# EAGLE board main_schematic4 (EAGLE 7.1.0)
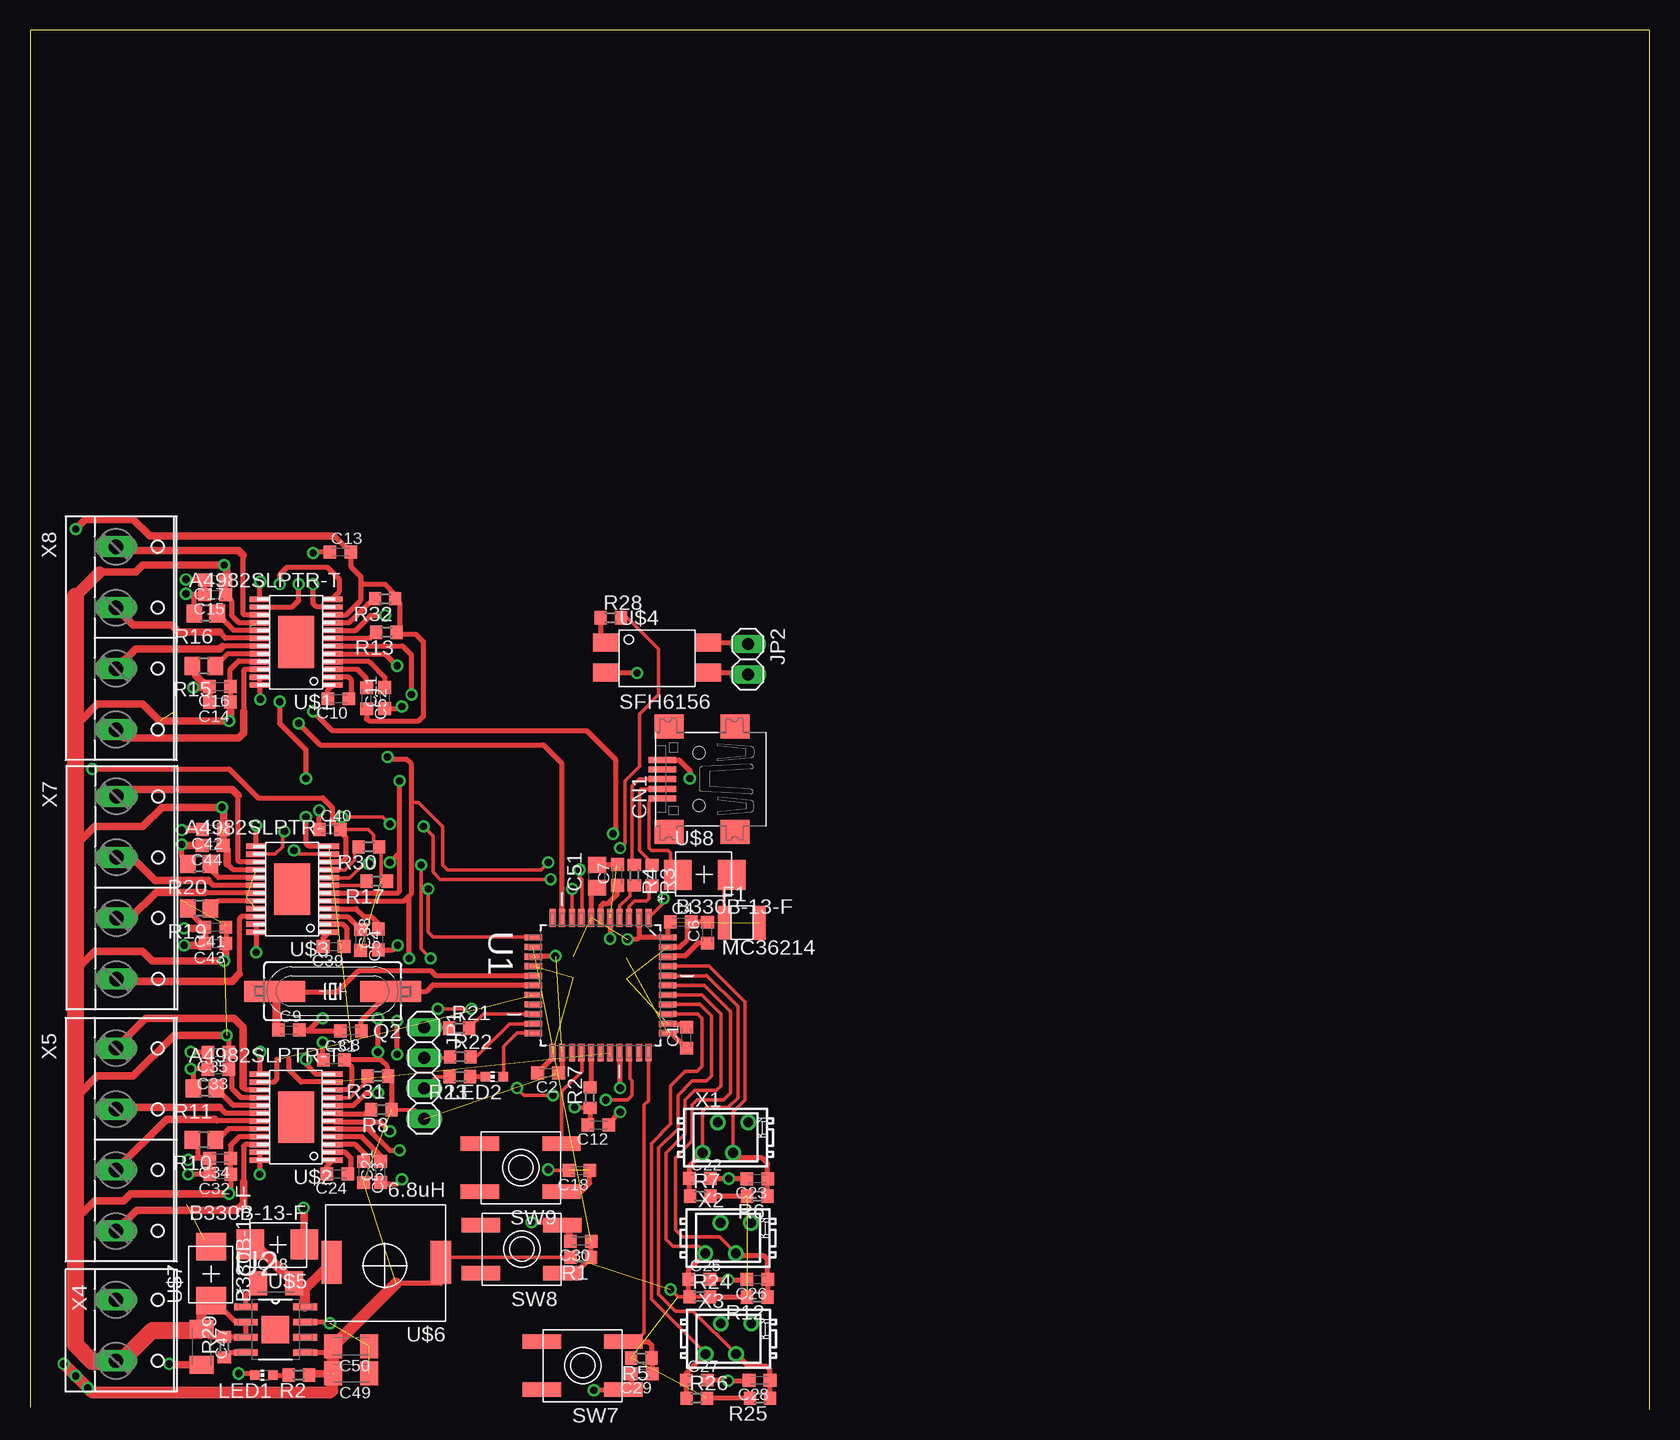
[diagram p0: board, top side]
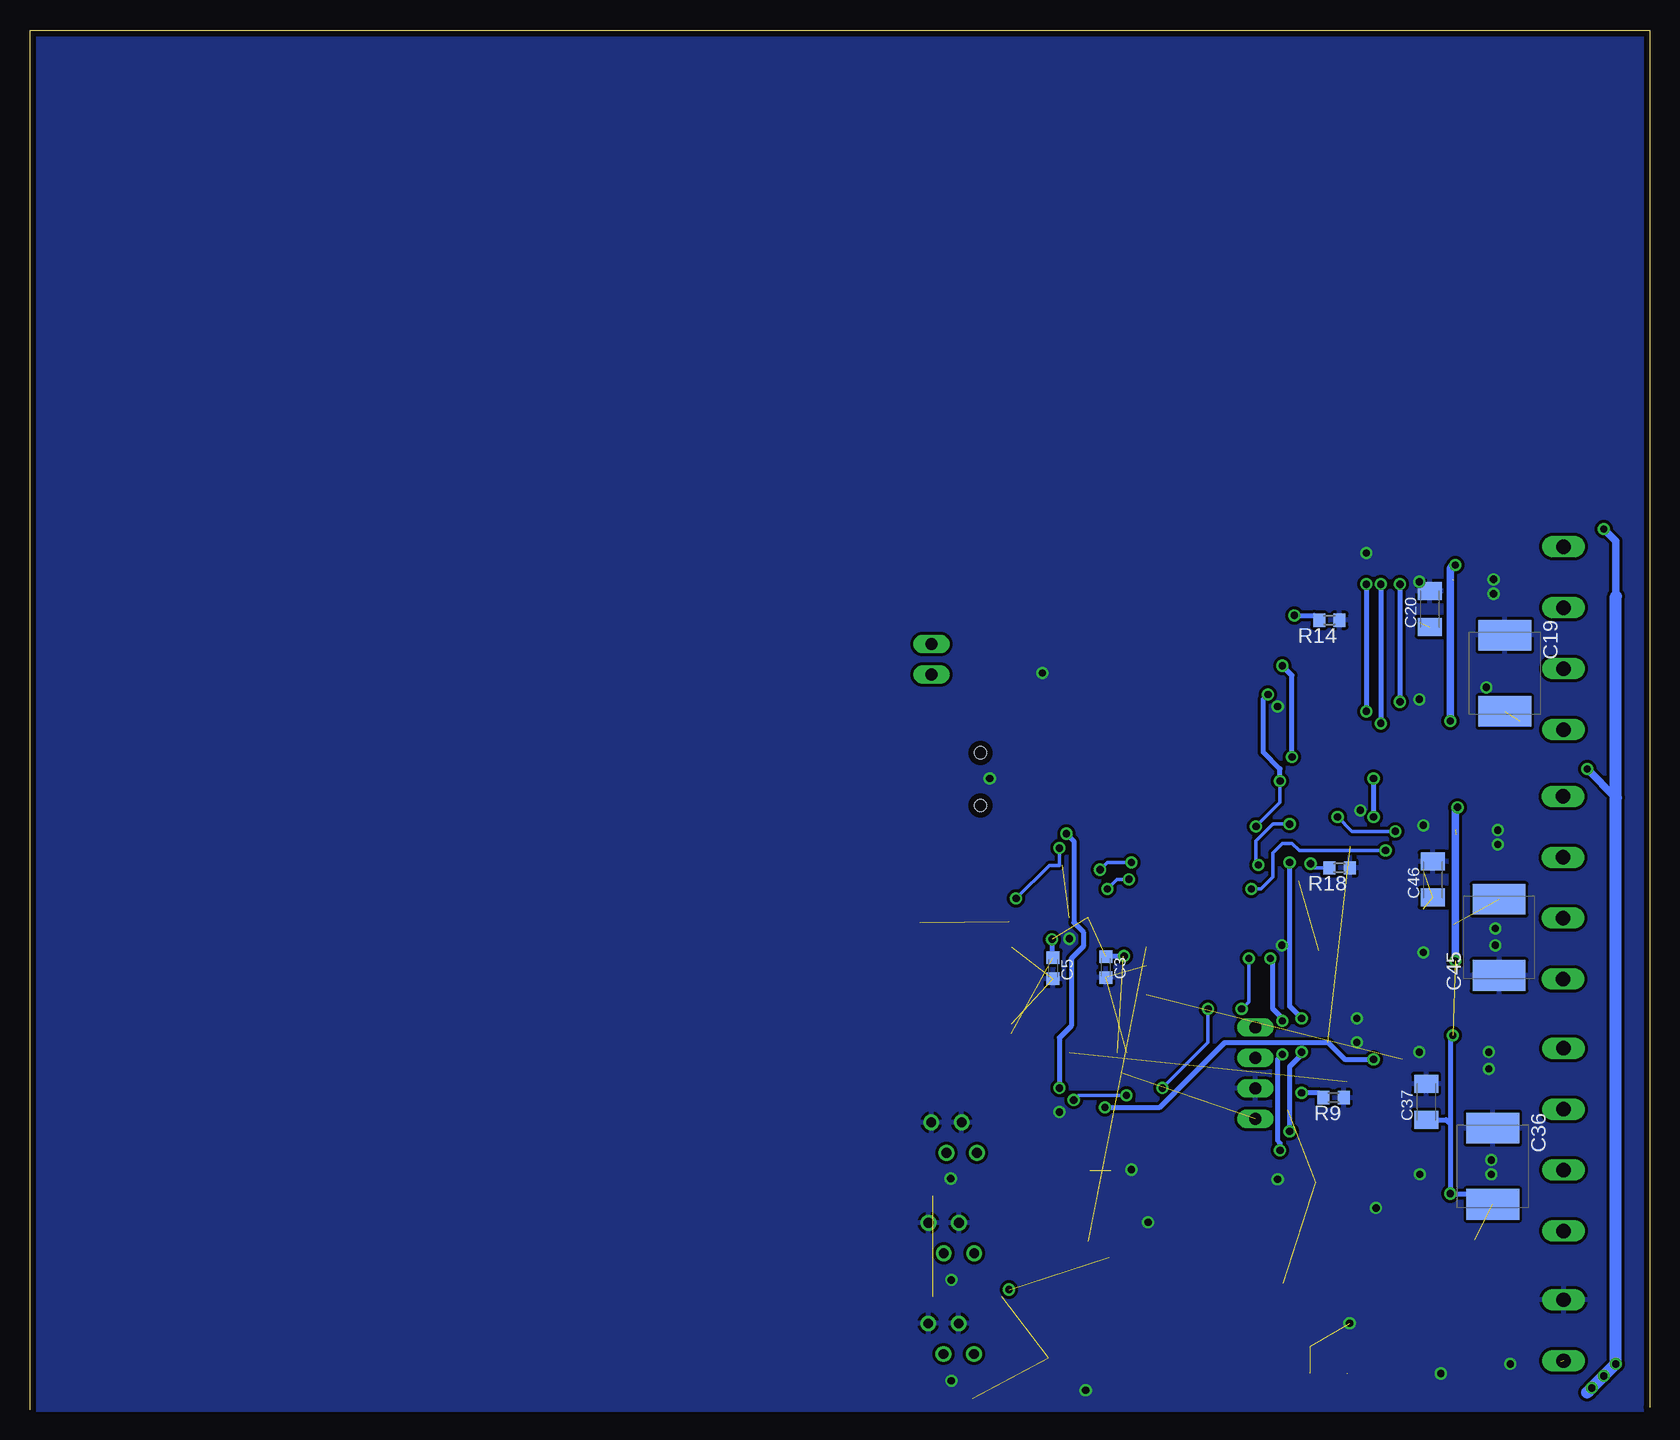
[diagram p1: board, bottom side, seen from below]

Size 135 x 115 mm. Coordinates in mm from the lower left corner, seen from the top.
Outline: 135,0 135,115 0,115 0,0.2
Copper layers (1*16): Top 0.035mm / dielectric 1.5mm / Bottom 0.035mm
Design rules "EDT_DRC": minimum track width 0.3mm, minimum drill 0.5mm, track to track 0.25mm, track to pad 0.25mm, pad to pad 0.25mm, via to via 0.25mm, smd to smd 0mil, copper to edge 0.5mm, drill to drill 8mil, minimum pad ring 10mil, minimum via ring 8mil, stop-mask expansion 4mil, vias tented up to drill 0mil, thermal gap 10mil

## Footprints (pad centres in the part's own frame; a part is rotated, then mirrored left to right if it is on the bottom)
C0603K = smd 1.05 x 1.08: 1 -0.875,0; 2 0.875,0
E/7260-38R = smd 2.55 x 4.4: + 3.175,0; - -3.175,0
C1206K = smd 1.5 x 2: 1 -1.5,0; 2 1.5,0
C0805 = smd 1.3 x 1.5: 1 -0.95,0; 2 0.95,0
USB-MINIB = smd 0.5 x 2.308: D+ 0,4.064; D- -0.8,4.064; GND 1.6,4.064; ID 0.8,4.064; VBUS -1.6,4.064 | smd 2 x 2.4: GND1 -4.4,-2; GND2 -4.4,3.5; GND3 4.4,3.5; GND4 4.4,-2 | hole 1: -2.2,1; 2.2,1
MC36214 = smd 1 x 2.8: P$1 0.239,1.4; P$2 3.196,1.39
1X04 = drill 1.016 long: 1 -3.81,0; 2 -1.27,0; 3 1.27,0; 4 3.81,0
1X02 = drill 1.016 long: 1 -1.27,0; 2 1.27,0
CHIP-LED0603 = smd 0.8 x 0.8: A 0,-0.75; C 0,0.75
SM49 = smd 5.08 x 1.778: 1 -4.826,0; 2 4.826,0
R0603 = smd 1 x 1.1: 1 -0.85,0; 2 0.85,0
R0805 = smd 1.3 x 1.5: 1 -0.95,0; 2 0.95,0
EVQ-Q2 = smd 3.2 x 1.2: A -3.4,-2; A' 3.4,-2; B -3.4,2; B' 3.4,2
QFP80P1200X1200X120-44N = smd 1.473 x 0.508: 1 -5.613,3.988; 2 -5.613,3.2; 3 -5.613,2.388; 4 -5.613,1.6; 5 -5.613,0.787; 6 -5.613,0; 7 -5.613,-0.787; 8 -5.613,-1.6; 9 -5.613,-2.388; 10 -5.613,-3.2; 11 -5.613,-3.988; 23 5.613,-3.988; 24 5.613,-3.2; 25 5.613,-2.388; 26 5.613,-1.6; 27 5.613,-0.787; 28 5.613,0; 29 5.613,0.787; 30 5.613,1.6; 31 5.613,2.388; 32 5.613,3.2; 33 5.613,3.988 | smd 0.508 x 1.473: 12 -3.988,-5.613; 13 -3.2,-5.613; 14 -2.388,-5.613; 15 -1.6,-5.613; 16 -0.787,-5.613; 17 0,-5.613; 18 0.787,-5.613; 19 1.6,-5.613; 20 2.388,-5.613; 21 3.2,-5.613; 22 3.988,-5.613; 34 3.988,5.613; 35 3.2,5.613; 36 2.388,5.613; 37 1.6,5.613; 38 0.787,5.613; 39 0,5.613; 40 -0.787,5.613; 41 -1.6,5.613; 42 -2.388,5.613; 43 -3.2,5.613; 44 -3.988,5.613
SOIC127P600X175-9N = smd 1.981 x 0.559: 1 -2.464,1.905; 2 -2.464,0.635; 3 -2.464,-0.635; 4 -2.464,-1.905; 5 2.464,-1.905; 6 2.464,-0.635; 7 2.464,0.635; 8 2.464,1.905 | smd 2.286 x 2.286: 9 0,0
TSSOP_24 = smd 1.65 x 0.45: P1 -3.175,3.67; P2 -3.175,3.02; P3 -3.175,2.37; P4 -3.175,1.72; P5 -3.175,1.07; P6 -3.175,0.42; P7 -3.175,-0.23; P8 -3.175,-0.88; P9 -3.175,-1.53; P10 -3.175,-2.18; P11 -3.175,-2.83; P12 -3.175,-3.48; P13 2.925,-3.48; P14 2.925,-2.83; P15 2.925,-2.18; P16 2.925,-1.53; P17 2.925,-0.88; P18 2.925,-0.23; P19 2.925,0.42; P20 2.925,1.07; P21 2.925,1.72; P22 2.925,2.37; P23 2.925,3.02; P24 2.925,3.67 | smd 3 x 4.32: P$1 -0.102,0.099
SFH6165 = smd 2.1 x 1.5: P1 -1.13,3.656; P2 -1.12,1.156; P3 7.446,1.156; P4 7.442,3.656
B330B-13-F = smd 2.3 x 2.5: P$1 -2.2,-0.022; P$2 2.299,-0.022
VLF10040 = smd 1.7 x 3.6: P$1 0.4,4.8; P$2 9.51,4.8
MICROMATCH-4 = drill 0.813: 1 1.905,1.27; 2 0.635,-1.27; 3 -0.635,1.27; 4 -1.905,-1.27
W237-132 = drill 1.194 long: 1 -2.54,-0.635; 2 2.54,-0.635
W237-4P = drill 1.194 long: 1 -7.62,-0.635; 2 -2.54,-0.635; 3 2.54,-0.635; 4 7.62,-0.635

## Placement (x,y rotation side)
C1  100nF  [C0603K]  54.72,31.01 90 top
C2  100nF  [C0603K]  43.19,28.07 180 top
C3  100nF  [C0603K]  45.32,36.89 270 bottom
C4  100nF  [C0603K]  54.26,40.63 0 top
C5  100nF  [C0603K]  49.72,36.79 270 bottom
C6  100nF  [C0603K]  56.47,39.76 90 top
C7  1uF  [C0603K]  48.96,44.56 90 top
C8  18pF  [C0603K]  26.74,31.56 180 top
C9  18pF  [C0603K]  21.58,31.64 0 top
C10  100nF  [C0603K]  25.7,59.25 180 top
C11  220nF  [C0603K]  29.57,59.31 90 top
C12  100nF  [C0603K]  47.39,23.72 180 top
C13  100nF  [C0603K]  25.86,71.48 0 top
C14  100nF  [C0603K]  15.84,58.97 180 top
C15  100nF  [C0603K]  15.44,67.92 180 top
C16  1uF  [C0603K]  15.83,60.26 180 top
C17  1uF  [C0603K]  15.44,69.16 180 top
C18  100nF  [C0603K]  45.79,19.92 180 top
C19  100uF  [E/7260-38R]  12.06,61.37 270 bottom
C20  10uF  [C1206K]  18.32,66.73 90 bottom
C21  220nF  [C0603K]  29.22,19.81 90 top
C22  100nF  [C0603K]  55.84,19.26 0 top
C23  100nF  [C0603K]  60.61,19.24 180 top
C24  100nF  [C0603K]  25.61,19.64 180 top
C25  100nF  [C0603K]  55.79,10.86 0 top
C26  100nF  [C0603K]  60.61,10.84 180 top
C27  100nF  [C0603K]  55.59,2.46 0 top
C28  100nF  [C0603K]  60.81,2.44 180 top
C29  100nF  [C0603K]  51.01,2.99 180 top
C30  100nF  [C0603K]  45.91,14.04 180 top
C31  100nF  [C0603K]  25.34,29.16 0 top
C32  100nF  [C0603K]  15.86,19.59 180 top
C33  100nF  [C0603K]  15.71,28.34 180 top
C34  1uF  [C0603K]  15.85,20.95 180 top
C35  1uF  [C0603K]  15.71,29.76 180 top
C36  100uF  [E/7260-38R]  13.06,20.28 270 bottom
C37  10uF  [C1206K]  18.62,25.65 90 bottom
C38  220nF  [C0603K]  29.04,39.19 90 top
C39  100nF  [C0603K]  25.31,38.59 180 top
C40  100nF  [C0603K]  24.99,48.36 0 top
C41  100nF  [C0603K]  15.46,40.21 180 top
C42  100nF  [C0603K]  15.26,48.36 180 top
C43  1uF  [C0603K]  15.45,38.85 180 top
C44  1uF  [C0603K]  15.23,47.01 180 top
C45  100uF  [E/7260-38R]  12.54,39.36 90 bottom
C46  10uF  [C1206K]  18.07,44.17 90 bottom
C47  10uF  [C1206K]  14.32,5.21 270 top
C48  100nF  [C1206K]  20.51,10.52 0 top
C49  22uF  [C1206K]  26.79,3.03 180 top
C50  22uF  [C1206K]  26.77,5.28 180 top
C51  10uF  [C0805]  47.27,44.45 90 top
C52  100nF  [C0603K]  28.05,59.3 270 top
C53  100nF  [C0603K]  27.8,19.8 270 top
C54  100nF  [C0603K]  27.55,39.15 270 top
CN1  [USB-MINIB]  56.76,52.55 90 top
F1  MC36214  [MC36214]  57.63,39.17 0 top
JP1  [1X04]  32.85,28.05 270 top
JP2  [1X02]  59.85,62.54 270 top
LED1  [CHIP-LED0603]  19.51,2.86 90 top
LED2  [CHIP-LED0603]  38.71,27.75 90 top
Q2  16MHz  [SM49]  25.24,34.86 180 top
R1  10k  [R0603]  45.92,12.7 180 top
R2  0.33k  [R0603]  22.41,2.88 180 top
R3  22  [R0603]  51.85,44.53 270 top
R4  22  [R0603]  50.38,44.54 270 top
R5  10k  [R0603]  50.95,4.3 180 top
R6  10k  [R0603]  60.63,17.8 180 top
R7  10k  [R0603]  55.89,17.8 0 top
R8  10k  [R0603]  29.29,25 180 top
R9  10k  [R0603]  26.33,26 180 bottom
R10  0.1  [R0805]  14.5,22.48 180 top
R11  0.1  [R0805]  14.58,26.77 180 top
R12  10k  [R0603]  60.62,9.38 180 top
R13  10k  [R0603]  29.71,64.8 180 top
R14  10k  [R0603]  26.69,65.8 180 bottom
R15  0.1  [R0805]  14.5,61.97 180 top
R16  0.1  [R0805]  14.65,66.37 180 top
R17  10k  [R0603]  28.92,44.05 180 top
R18  10k  [R0603]  25.85,45.15 180 bottom
R19  0.1  [R0805]  14.1,41.77 180 top
R20  0.1  [R0805]  14.1,45.47 180 top
R21  1k  [R0603]  35.77,31.8 0 top
R22  1k  [R0603]  35.89,29.4 0 top
R23  330  [R0603]  35.84,27.75 180 top
R24  10k  [R0603]  55.83,9.4 0 top
R25  10k  [R0603]  60.85,0.95 180 top
R26  10k  [R0603]  55.57,0.95 0 top
R27  3.9k  [R0603]  46.68,26.01 90 top
R28  180  [R0603]  48.4,66 0 top
R29  100k  [R0603]  16.2,5.2 90 top
R30  10k  [R0603]  28.25,46.9 180 top
R31  10k  [R0603]  29,27.8 180 top
R32  10k  [R0603]  29.6,67.6 180 top
SW7  SPST_TACT-EVQQ2  [EVQ-Q2]  46.07,3.66 180 top
SW8  SPST_TACT-EVQQ2  [EVQ-Q2]  40.99,13.36 180 top
SW9  SPST_TACT-EVQQ2  [EVQ-Q2]  40.91,20.16 180 top
U1  ATMEGA32U4-AU  [QFP80P1200X1200X120-44N]  47.56,35.36 270 top
U2  ADP2302ARDZ-5.0-R7  [SOIC127P600X175-9N]  20.47,6.66 0 top
U$1  A4982SLPTR-T  [TSSOP_24]  22.08,64.07 180 top
U$2  A4982SLPTR-T  [TSSOP_24]  22.07,24.47 180 top
U$3  A4982SLPTR-T  [TSSOP_24]  21.76,43.47 180 top
U$4  SFH6156  [SFH6165]  49.12,60.29 0 top
U$5  B330B-13-F  [B330B-13-F]  20.66,13.75 180 top
U$6  6.8uH  [VLF10040]  34.66,17.07 180 top
U$7  B330B-13-F  [B330B-13-F]  15.1,11.3 90 top
U$8  B330B-13-F  [B330B-13-F]  56.2,44.6 0 top
X1  MICROMATCH-4  [MICROMATCH-4]  57.97,22.67 0 top
X2  MICROMATCH-4  [MICROMATCH-4]  58.2,14.3 0 top
X3  MICROMATCH-4  [MICROMATCH-4]  58.22,5.9 0 top
X4  [W237-132]  7.8,6.6 270 top
X5  [W237-4P]  7.8,22.5 270 top
X7  [W237-4P]  7.85,43.5 270 top
X8  [W237-4P]  7.8,64.3 270 top

## Library data of the parts
C1-C54 R1-R32 = rcl
CN1 LED1 LED2 SW7-SW9 = adafruit
F1 = PTC
JP1 JP2 = pinhead
Q2 = crystal; OC_FARNELL: unknown; OC_NEWARK: unknown
U1 = ATmega32U4; MPN: ATMEGA32U4-AU; OC_FARNELL: 1748525; OC_NEWARK: 26R5633; PACKAGE: TQFP-44; SUPPLIER: Atmel
U2 = ADP2302ARDZ-5.0-R7; MPN: ADP2302ARDZ-5.0-R7; OC_FARNELL: 2312892; OC_NEWARK: 67W2704; PACKAGE: SOIC-8; SUPPLIER: Analog Devices
U$1-U$3 = Allegro_A4982_driver
U$4 = SFH6156
U$5 U$7 U$8 = schottky_B330B-13-F
U$6 = InductorVLF10040
X1-X3 = con-amp-micromatch; MPN: 7-215464-4; OC_FARNELL: 3784629; OC_NEWARK: 19R8124
X4 X5 X7 X8 = con-wago-508; OC_FARNELL: unknown; OC_NEWARK: unknown

## Nets
ANALOG: C12.2 R27.1 U$1.P12 U$2.P12 U$3.P12
DEBUG_LED: LED2.A U1.22
DIR1: U1.10 U$1.P14
DIR2: U1.18 U$2.P14
DIR3: U1.31 U$3.P14
HWB: C29.1 R5.1 SW7.A U1.33
KILL1: C28.1 R25.1 U1.37 X3.2
KILL2: C27.1 R26.1 U1.36 X3.4
KILL3: C26.1 R12.1 U1.39 X2.2
KILL4: C25.1 R24.1 U1.38 X2.4
KILL5: C23.1 R6.1 U1.41 X1.2
KILL6: C22.1 R7.1 U1.40 X1.4
MS1: U1.8 U$1.P5 U$2.P5 U$3.P5
MS2: U1.9 U$1.P6 U$2.P6 U$3.P6
N$1: JP2.1 U$4.P4
N$2: C6.1 U1.42
N$3: LED1.A R2.2
N$4: CN1.D- R3.1
N$5: CN1.D+ R4.1
N$6: C10.2 U$1.P1
N$7: C10.1 U$1.P2
N$8: U$1.P15 X8.1
N$9: U$1.P22 X8.4
N$10: C11.2 U$1.P4
N$11: C7.1 U1.6
N$12: R13.2 U$1.P7
N$13: C24.2 U$2.P1
N$14: R14.2 U$1.P8
N$15: R15.1 U$1.P20
N$16: R16.1 U$1.P17
N$17: C24.1 U$2.P2
N$18: U$1.P19 X8.3
N$19: R10.1 U$2.P20
N$20: U$1.P18 X8.2
N$21: R11.1 U$2.P17
N$22: U$2.P22 X5.4
N$23: U$2.P15 X5.1
N$24: U$2.P19 X5.3
N$25: U$2.P18 X5.2
N$26: C21.2 U$2.P4
N$27: R8.2 U$2.P7
N$28: R9.2 U$2.P8
N$29: C39.2 U$3.P1
N$30: C39.1 U$3.P2
N$31: R19.1 U$3.P20
N$32: R20.1 U$3.P17
N$33: U$3.P22 X7.4
N$34: U$3.P15 X7.1
N$35: U$3.P19 X7.3
N$36: U$3.P18 X7.2
N$37: C38.2 U$3.P4
N$38: R17.2 U$3.P7
N$39: CN1.VBUS U$8.P$1
N$40: JP1.1 R21.1
N$41: JP1.2 R22.1
N$42: JP2.2 U$4.P3
N$43: R18.2 U$3.P8
N$44: LED2.C R23.1
N$45: R29.1 U2.4
N$47: C48.1 U2.1
N$48: R28.1 U$4.P1
N$49: F1.P$1 U$8.P$2
N$50: C52.1 U$1.P3
N$51: C48.2 U2.8 U$5.P$2 U$6.P$2
N$52: C53.1 U$2.P3
N$53: C54.1 U$3.P3
N$78: R30.2 U$3.P9
N$95: R31.2 U$2.P9
N$98: R32.2 U$1.P9
N$100: C14.1 C15.1 C16.1 C17.1 C19.+ C20.1 C32.1 C33.1 C34.1 C35.1 C36.+ C37.1 C41.1 C42.1 C43.1 C44.1 C45.+ C46.1 C47.1 R29.2 U2.2 U2.3 U$1.P16 U$1.P21 U$2.P16 U$2.P21 U$3.P16 U$3.P21 U$7.P$1 U$7.P$2 X4.2
N$101: C1.2 C2.2 C3.2 C4.2 C5.2 C6.2 C7.2 C8.2 C9.2 C11.1 C12.1 C13.1 C14.2 C15.2 C16.2 C17.2 C18.1 C18.2 C19.- C20.2 C21.1 C22.2 C23.2 C25.2 C26.2 C27.2 C28.2 C29.2 C30.2 C31.1 C32.2 C33.2 C34.2 C35.2 C36.- C37.2 C38.1 C40.1 C41.2 C42.2 C43.2 C44.2 C45.- C46.2 C47.2 C49.1 C50.1 C51.2 CN1.GND JP1.3 LED1.C R9.1 R10.2 R11.2 R14.1 R15.2 R16.2 R18.1 R19.2 R20.2 R23.2 SW7.B SW8.A SW9.B U1.5 U1.15 U1.23 U1.35 U1.43 U2.7 U$1.P13 U$1.P23 U$1.P24 U$2.P13 U$2.P23 U$2.P24 U$3.P13 U$3.P23 U$3.P24 U$4.P2 U$5.P$1 X1.1 X1.3 X2.1 X2.3 X3.1 X3.3 X4.1
SHUTTER: R28.2 U1.1
START/STOP: SW9.A U1.26
STEP1: U1.30 U$1.P11
STEP2: U1.29 U$2.P11
STEP3: U1.12 U$3.P11
T0/OC4D: R27.2 U1.27
UART_RX: R21.2 U1.20
UART_TX: R22.2 U1.21
USB_D+: R4.2 U1.4
USB_D-: R3.2 U1.3
VCC: C1.1 C2.1 C3.1 C4.1 C5.1 C13.2 C31.2 C40.2 C49.2 C50.2 C51.1 C52.2 C53.2 C54.2 F1.P$2 JP1.4 R1.2 R2.1 R5.2 R6.2 R7.2 R8.1 R12.2 R13.1 R17.1 R24.2 R25.2 R26.2 R30.1 R31.1 R32.1 U1.2 U1.7 U1.14 U1.24 U1.34 U1.44 U2.5 U$1.P10 U$2.P10 U$3.P10 U$6.P$1
XTAL1: C8.1 Q2.1 U1.17
XTAL2: C9.1 Q2.2 U1.16
~RESET: C30.1 R1.1 SW8.B U1.13

## Tracks (layer width: path | path; a pad name or v marks a point on that pad's centre or on a via)
ANALOG  (via drill 0.6)  (1 unrouted)
  Top 0.305: 46.68,23.89 C12.2
  Top 0.406: 46.68,23.89 R27.1 45.44,25.16 v45.4,25.2 | U$2.P12 23.85,27.95 23,28.8 v23,29.2 | U$1.P12 25.25,67.66 25.8,68.2 25.8,69.2 24.8,70.2 21.4,70.2 20.8,69.6 v20.8,68.8 | v20.8,59 20.8,57.2 23,55 v23,52.6 | U$3.P12 23.25,46.95 23,47.2 v23,49.4
  Bottom 0.406: v45.4,25.2 40.8,25.2 35.4,30.6 26.8,30.6 25.4,29.2 v23,29.2 | v20.8,68.8 v20.8,59 | v23,49.4 v23,52.6
DEBUG_LED
  Top 0.305: LED2.A 39.46,30.26 40.6,31.4 41.92,31.4 U1.22
DIR1  (via drill 0.6)
  Top 0.406: U$1.P14 21.85,66.9 22.4,67.45 v22.4,68.8 | v22.4,57.2 24.2,55.4 42.8,55.4 44.3,53.9 44.3,41.03 U1.10
  Bottom 0.406: v22.4,68.8 v22.4,57.2
DIR2  (1 unrouted)
  Top 0.406: U$2.P14 20.35,27.3 20.6,27.55 20.6,29.2
DIR3  (via drill 0.6)
  Top 0.305: U$3.P14 20.45,46.3 21.05,46.9 21.05,48.05 v21.2,48.2 | v26,49.4 29.4,49.4 v30,48.8 | v32.6,45.4 32.6,38.4 v33.4,37.6 | v34,33.4 v36.8,33.4 | v40.6,26.8 41.2,26.2 v43.6,26.2 | v48,25.8 49.8,25.8 50.2,26.2 50.2,27.4 50,27.6 50,29.69 U1.31
  Bottom 0.305: v21.2,48.2 24.8,48.2 v26,49.4 | v33.4,37.6 33.4,34 v34,33.4 | v36.8,33.4 36.8,30.6 v40.6,26.8 | v43.6,26.2 47.6,26.2 v48,25.8 | v30,48.8 31.4,48.8 32.8,47.4 32.8,45.6 v32.6,45.4
HWB
  Top 0.305: 51.54,5.66 51.48,5.6 50.4,5.6 51.2,6.4 51.2,25.4 51.55,25.75 U1.33
  Top 0.406: SW7.A 51.54,5.66 51.8,5.4 R5.1 51.88,4.21 C29.1
KILL1
  Top 0.305: U1.37 55.76,33.76 55.8,33.8 56.8,32.8 56.8,27.8 56.4,27.4 55.2,27.4 54,26.2 54,23.4 52.4,21.8 52.4,9.6 53.8,8.2 55.28,8.2 X3.2
  Top 0.406: X3.2 59.88,3.6 61.4,3.6 61.69,3.31 C28.1 61.7,2.42 R25.1
KILL2
  Top 0.305: U1.36 55.63,32.97 56,32.6 56,28.6 55.6,28.2 54.6,28.2 53.4,27 53.4,23.8 51.8,22.2 51.8,9.2 56.31,4.68 X3.4
  Top 0.406: X3.4 54.72,3.03 C27.1 R26.1
KILL3
  Top 0.305: U1.39 56.24,35.36 58.4,33.2 58.4,26.4 57.8,25.8 55.6,25.8 55.2,25.4 55.2,22.4 53.8,21 53.8,15 54.4,14.4 57.47,14.4 X2.2
  Top 0.406: X2.2 59.06,12.8 61.2,12.8 61.48,12.52 C26.1 61.47,10.82 R12.1
KILL4
  Top 0.305: U1.38 56.03,34.57 57.6,33 57.6,27 57.2,26.6 55.4,26.6 54.6,25.8 54.6,23 53,21.4 53,14.2 53.6,13.6 55.73,13.6 X2.4
  Top 0.406: X2.4 54.91,11.65 C25.1 54.91,9.46 R24.1
KILL5
  Top 0.305: U1.41 53.17,36.97 53.2,37 56.6,37 59.6,34 59.6,25.8 58.6,24.8 X1.2
  Top 0.406: X1.2 59.01,21 61,21 61.48,20.52 C23.1 R6.1
KILL6
  Top 0.305: U1.40 56.35,36.15 56.4,36.2 59,33.6 59,26 58.2,25.2 56.4,25.2 56.06,24.86 X1.4
  Top 0.406: X1.4 54.97,20.3 C22.1 54.97,17.88 R7.1
MS1  (via drill 0.6)
  Top 0.305: 31.8,50.6 32.4,50.6 34.4,48.6 34.4,45.4 34.8,45 42.6,45 v43.2,45.6 | v45.8,45 45.8,44.4 46,44.2 46,41.01 U1.8
  Top 0.406: U$3.P5 31.2,42.4 31.6,42.8 | U$1.P5 29.6,63 v30.6,62 | v29.8,54.4 30,54.2 31.4,54.2 31.8,53.8 31.8,50.6 31.8,43 31.6,42.8 | U$2.P5 28.2,23.4 30,21.6 v30.8,21.6 | v31.6,37.6 31.6,42.8 | v30.6,29.6 v30.6,32.4
  Bottom 0.305: v43.2,45.6 45.2,45.6 v45.8,45
  Bottom 0.406: v29.8,54.4 29.8,61.2 v30.6,62 | v30.8,21.6 30.8,22.2 31,22.4 31,29.2 v30.6,29.6 | v30.6,32.4 30.6,32.6 31.4,33.4 31.4,37.4 v31.6,37.6
MS2  (via drill 0.6)
  Top 0.305: U$2.P6 25.3,24 | 30.8,43.2 v30.8,52.4 | v32.8,48.6 33.6,47.8 33.6,44.8 34.2,44.2 v43.4,44.2 | v45.2,43.4 45.2,41 U1.9
  Top 0.406: U$3.P6 30.65,43.05 30.8,43.2 30.8,46.4 | 25.3,24 29.2,24 v30,23.2 | U$1.P6 31.05,63.65 31.8,62.9 v31.8,59.6 | 30.8,46.4 v30.8,52.4 | v29,29.8 v29,32.6 | v30,45.6 30.8,46.4
  Bottom 0.305: v30.8,52.4 30.8,50.6 v32.8,48.6 | v43.4,44.2 44.4,44.2 v45.2,43.4
  Bottom 0.406: v30.8,52.4 30.8,53.4 32.2,54.8 32.2,59.2 v31.8,59.6 | v30,23.2 30,28.6 29,29.6 v29,29.8 | v29,32.6 30,33.6 v30,45.6
N$1
  Top 0.406: U$4.P4 59.71,63.95 JP2.1
N$2
  Top 0.406: C6.1 55.69,38.88 54.6,37.8 53.23,37.8 U1.42
N$3
  Top 0.406: LED1.A 21.54,2.86 R2.2
N$4
  Top 0.305: CN1.D- 50.95,51.75 50.8,51.6 50.8,46.6 51.6,45.8 51.6,45.63 R3.1
N$5
  Top 0.305: CN1.D+ 50.75,52.55 50.2,52 50.2,45.57 R4.1
N$6
  Top 0.406: C10.2 24.82,59.97 U$1.P1
N$7
  Top 0.406: C10.1 26.65,59.25 26.8,59.4 26.8,60.8 26.55,61.05 U$1.P2
N$8
  Top 0.406: U$1.P15 17.85,66.25 17.75,66.35 17.75,71.25
  Top 0.61: 17.75,71.25 17.4,71.6 7.49,71.6 X8.1
N$9
  Top 0.406: U$1.P22 17.9,61.7 17.8,61.6 17.8,58.2
  Top 0.61: 17.8,58.2 17.8,56.4 17.4,56 7.84,56 X8.4
N$10
  Top 0.406: U$1.P4 28.25,62.35 29.57,61.03 C11.2
N$11
  Top 0.406: U1.6 47.6,41.01 47.6,42 47.8,42.2 48.2,42.2 48.96,42.96 C7.1
N$12
  Top 0.406: U$1.P7 28.36,64.3 R13.2
N$13
  Top 0.406: U$2.P1 24.73,20.29 C24.2
N$14  (via drill 0.6)
  Top 0.406: U$1.P8 27.15,64.95 28.4,66.2 v29.6,66.2
  Bottom 0.406: v29.6,66.2 27.94,66.2 R14.2
N$15
  Top 0.406: U$1.P20 16.48,63 R15.1
N$16
  Top 0.406: U$1.P17 17.02,64.95 R16.1
N$17
  Top 0.406: C24.1 26.75,19.91 26.75,20.95 26.25,21.45 U$2.P2
N$18
  Top 0.406: U$1.P19 16.05,63.65 16,63.6
  Top 0.61: 16,63.6 15.8,63.4 8.8,63.4 X8.3
N$19
  Top 0.406: U$2.P20 16.55,23.4 15.63,22.48 R10.1
N$20
  Top 0.406: U$1.P18 16.3,64.3 15.8,64.8
  Top 0.61: 15.8,64.8 12.4,64.8 11.8,65.4 8.61,65.4 X8.2
N$21
  Top 0.406: U$2.P17 16.95,25.35 R11.1
N$22
  Top 0.406: U$2.P22 17.95,22.1 17.8,21.95 17.8,19
  Top 0.61: 17.8,19 17.8,17.2 17.2,16.6 8.88,16.6 X5.4
N$23
  Top 0.406: U$2.P15 18,26.65 17.75,26.9
  Top 0.61: 17.75,26.9 17.75,31.85 17,32.6 9.64,32.6 X5.1
N$24
  Top 0.406: U$2.P19 15.55,24.05 15.4,24.2
  Top 0.61: 15.4,24.2 11.4,24.2 X5.3
N$25
  Top 0.406: U$2.P18 16.3,24.7 15.8,25.2
  Top 0.61: 15.8,25.2 7.33,25.2 X5.2
N$26
  Top 0.406: C21.2 29.2,20.7 29.2,21.2 27.65,22.75 U$2.P4
N$27
  Top 0.406: U$2.P7 25.3,24.65 27.9,24.65 28.25,25 R8.2
N$28  (via drill 0.6)
  Top 0.406: U$2.P8 26.95,25.35 28,26.4 v29,26.4
  Bottom 0.305: R9.2 27.58,26.4
  Bottom 0.406: 27.58,26.4 v29,26.4
N$29
  Top 0.406: U$3.P1 24.43,39.3 C39.2
N$30
  Top 0.406: C39.1 26.45,38.85 26.45,40.1 26.1,40.45 U$3.P2
N$31
  Top 0.406: U$3.P20 15.68,42.4 R19.1
N$32
  Top 0.406: U$3.P17 15.72,44.35 15.05,45.02 R20.1
N$33
  Top 0.406: U$3.P22 17.65,41.1 17.45,40.9 17.45,36.3
  Top 0.61: 17.45,36.3 16.85,35.7 7.39,35.7 X7.4
N$34
  Top 0.406: U$3.P15 17.45,45.65 17.35,45.75 17.35,51.2 | 7.24,51.1 X7.1
  Top 0.61: 17.35,51.2 16.85,51.7 7.79,51.7 X7.1
N$35
  Top 0.406: U$3.P19 14.6,43.05 14.55,43.1
  Top 0.61: 14.55,43.1 10.5,43.1 8.36,40.96 X7.3
N$36
  Top 0.406: U$3.P18 15.25,43.7 14.85,44.1
  Top 0.61: 14.85,44.1 10.45,44.1 8.51,46.04 X7.2
N$37
  Top 0.406: U$3.P4 27.2,41.75 27.85,41.1 28.45,41.1 29.04,40.51 C38.2
N$38
  Top 0.305: U$3.P7 27.72,43.7 R17.2
N$39
  Top 0.305: CN1.VBUS 51.95,50.95 51.6,50.6 51.6,46.8 51.8,46.6 53.2,46.6 53.4,46.4 53.4,45.18 U$8.P$1
N$40
  Top 0.305: JP1.1 34.86,31.86 R21.1
N$41
  Top 0.305: JP1.2 34.96,29.32 R22.1
N$42
  Top 0.406: U$4.P3 59.35,61.45 59.4,61.4 59.72,61.4 JP2.2
N$43  (via drill 0.6)
  Top 0.305: U$3.P8 24.98,44.3 26.65,44.3 27.85,45.5 v28.25,45.5
  Bottom 0.305: v28.25,45.5 27.9,45.15 R18.2
N$44
  Top 0.406: LED2.C R23.1
N$45
  Top 0.406: R29.1 16.61,4.75 U2.4
N$47
  Top 0.406: U2.1 18.01,9.52 C48.1
N$48
  Top 0.406: R28.1 47.55,64.39 U$4.P1
N$49
  Top 0.305: U$8.P$2 57.87,43.95 F1.P$1
N$50
  Top 0.406: C52.1 28,60.23 28,61 27.3,61.7 U$1.P3
N$51
  Top 0.406: U$5.P$2 18.76,13.77
  Top 0.813: U2.8 22.93,9.6 | 22.93,9.6 C48.2 18.76,13.77 | 22.93,9.6 22.93,10.05 U$6.P$2
N$52
  Top 0.406: C53.1 28,20.88 28,21.2 27.1,22.1 U$2.P3
N$53
  Top 0.406: U$3.P3 26.48,41.1 C54.1
N$78
  Top 0.305: U$3.P9 26.25,45 27.05,45.8 27.05,46.55 R30.2
N$95
  Top 0.305: U$2.P9 26.7,26 28.15,27.45 R31.2
N$98
  Top 0.406: U$1.P9 26.6,65.6 26.8,65.8 26.85,65.8 28.35,67.3 28.45,67.3 R32.2
N$100  (via drill 0.6)  (10 unrouted)
  Top 0.406: 16.62,40.5 C41.1 | 16.68,40.55 C41.1 | 16.34,40.41 C41.1 | C41.1 16.34,38.86 C43.1 | U$3.P16 16.95,45 16.45,45.5 | U$2.P21 17.45,22.75 16.73,22.02 C34.1 C32.1 16.73,18.14 v16.6,18 | U$2.P16 17.6,26 16.85,26.75 16.85,28.34 C33.1 | 16.61,28.34 C33.1 | C33.1 C35.1 16.59,31.02 v16.4,31.2 | C47.1 14.98,6.05 R29.2 17.35,6.05 17.4,6 17.98,6 U2.3 U2.2 17.11,7.29 15.2,9.2 | 14.32,8.3 U$7.P$1 | 15.66,14.14 U$7.P$2 | C14.1 C16.1 16.7,61.7 17.4,62.4 19.11,62.4 U$1.P21 | U$1.P16 17.4,65.6 16.8,66.2 16.8,67.4 16.32,67.89 C15.1 C17.1
  Top 0.61: 16.4,69.2 16.4,70.2 v16.2,70.4 9.4,70.4 8.8,69.8 5.8,69.8 | 16.11,47.94 C44.1 16.45,46.66 16.45,45.5 | U$7.P$2 14.1,13.6 | v16.6,18 8.4,18 7.8,17.4 5.4,17.4 4.4,16.4 3.8,16.4 | v16.4,31.2 12,31.2 8.6,27.8 5.6,27.8 4,26.2 | C43.1 16.32,37.52 v16.2,37.4 10.2,37.4 9.4,38.2 5.4,38.2 4.2,37 | C42.1 16.14,50.06 v16,50.2 11,50.2 9.4,48.6 5.4,48.6 4.2,47.4 | C14.1 16.71,57.52 arc-90 v16.6,57.4 10.8,57.4 9.4,58.8 5.6,58.8 4,57.2
  Top 0.813: C47.1 14.32,8.3 | 14.56,14.16 U$7.P$2
  Top 1.016: 5.8,69.8 3.8,67.8
  Top 1.422: X4.2 7.66,4.06 10.2,6.6 14.21,6.6 C47.1 | 7.4,4 5.2,4 3.8,5.4 3.8,16.4 3.8,67.8
  Bottom 0.406: C36.+ 13.96,18 v16.6,18 16.6,23.8 | v16.4,31.2 16.6,31 16.6,23.8 | C37.1 16.95,24.15 16.6,23.8
  Bottom 0.61: v16,50.2 16.2,50 v16.2,37.4 | v16.6,57.4 16.6,70 arc90 v16.2,70.4
N$101  (via drill 0.6)  (8 unrouted)
  Top 0.305: R23.2 33.82,27.75 JP1.3 | C18.2 43.28,19.92 v43.2,20
  Top 0.406: U$3.P23 U$3.P24 18.85,39.78 v18.85,38.1 | C43.2 14.57,40.2 C41.2 13.15,41.65 R19.2 13.15,41.6 14.65,40.1 14.65,38.7 | U$3.P13 18.85,46.97 v18.85,48.7 | v12.65,47.1 12.65,46.01 13.15,45.51 R20.2 | C38.1 30.27,38.31 v30.65,38.7 | C40.1 24.11,49.94 v24.1,49.95 | U1.23 43.57,29.33 C2.2 | U1.35 54.45,32.16 C1.2 | U1.5 v48.35,39.25 | C51.2 48.92,45.4 C7.2 | SW8.A 45.03,14.71 C30.2 45.03,14.56 44,15.6 v41.8,15.6 | SW7.B 50.13,2.33 C29.2 50.13,2.13 49.8,1.8 48.4,1.8 48.2,1.6 v47,1.6 | SW9.B 45.56,18.16 45.6,18.2 46,18.2 46.66,18.86 C18.1 | LED1.C 18.7,3 v17.4,3 | C23.2 58.31,19.24 58.3,19.25 v58.25,19.25 C22.2 | C25.2 58.14,10.86 v58.2,10.8 59.7,10.8 C26.2 | U1.43 54.16,38.56 54.8,39.2 54.8,40.3 C4.2 C6.2 | CN1.GND 54.1,54.15 55,53.25 v55,52.6 | C21.1 29.36,18.8 30.6,18.8 v31,19.2 | C31.1 24.4,29.23 v24.4,30.6 | U$2.P13 19.2,28 v19.2,29.8 | U$2.P23 U$2.P24 v19.15,19.6 | C32.2 C34.2 13.35,20.95 | C35.2 C33.2 C35.2 14.8,29.8 | v13.4,29.8 14.8,29.8 | 14.8,29.8 14.8,28.4 v13.4,28.4 13.63,28.17 R11.2 | 13.35,20.95 v13.2,20.8 | 13.35,20.95 13.4,21 14,21 | v13.2,19.6 15,19.6 15,21 14,21 | 14,21 14,22.03 R10.2 | U$4.P2 50.55,61.45 v50.6,61.4 | U2.7 24.91,7.29 v25,7.2 | U$1.P23 U$1.P24 19.16,59.24 v19.2,59.2 | C15.2 C17.2 | C15.2 C17.2 14.6,69.2 v13,69.2 | C15.2 13.4,67.92 | 13.4,67.92 13.08,67.92 v13,68 | R16.2 13.7,67.62 13.4,67.92 | U$1.P13 19.16,68.95 v19.2,69 | 23.18,31.56 C8.2 | C9.2 23.09,31.64 23.18,31.56 | C27.2 58.14,2.46 v58.2,2.4 59.9,2.4 C28.2 | C11.1 30.84,58.44 v31,58.6 | C12.1 48.27,23.86 v49.2,24.8 | 23.18,31.56 24.21,32.6 v24.4,32.6 | C13.1 23.68,71.48 v23.6,71.4
  Top 0.61: C44.2 12.74,47.01 v12.65,47.1 | C42.2 12.71,48.36 v12.65,48.3 | 14.65,38.7 v12.85,38.7 | 14.65,40.1 v12.85,40.1 | C14.2 C16.2 | C16.2 14.89,60.2 v13.6,60.2 | R15.2 13.8,61.72 13.8,61.2 14.74,60.26 C16.2 | C47.2 11.69,3.71 v11.6,3.8 | U$5.P$1 22.86,16.74 v22.8,16.8
  pour Bottom: 0,0 134.5,0 134.5,114.5 0,114.5
SHUTTER  (via drill 0.6)
  Top 0.305: R28.2 49.8,66 52.4,63.4 52.4,59.6 50.8,58 50.8,53.6 49.6,52.4 49.6,47.2 v49.2,46.8 | v52.8,42.6 52.8,42.23 U1.1
  Bottom 0.305: v49.2,46.8 49.2,45.37 50.03,45.37 v52.8,42.6
START/STOP
  Top 0.305: SW9.A 44.31,26.51 46,28.2 46,29.71 U1.26
STEP1  (via drill 0.6)
  Top 0.406: U$1.P11 23.9,66.9 23.6,67.2 v23.6,68.8 | v23.6,58.2 25.2,56.6 46.4,56.6 48.8,54.2 48.8,48.2 v48.6,48 | v49.2,26.8 49.2,29.71 U1.30
  Bottom 0.406: v23.6,68.8 v23.6,58.2 | v48.6,48 48,47.4 48,40.6 47.2,39.8 47.2,38.6 48.2,37.6 48.2,32 49.2,31 v49.2,26.8
STEP2  (1 unrouted)
  Top 0.406: U$2.P11 22.6,27.3 21.6,28.3 21.6,29.2
STEP3  (via drill 0.6)
  Top 0.305: 22.85,46.3 U$3.P11 22.3,46.3 v22,46.6 | v33.2,43.4 33.2,39.8 33.6,39.4 41.89,39.4 U1.12
  Bottom 0.305: v22,46.6 29.2,46.6 29.8,47.2 30.6,47.2 31.4,46.4 31.4,44.4 32.4,43.4 v33.2,43.4
T0/OC4D
  Top 0.406: U1.27 46.77,26.95 R27.2
UART_RX
  Top 0.305: R21.2 37.79,32.97 U1.20
UART_TX
  Top 0.305: R22.2 37.2,29.4 39.96,32.16 U1.21
USB_D+
  Top 0.305: R4.2 50,43.31 50,42.8 49.16,41.96 U1.4
USB_D-
  Top 0.305: U1.3 49.95,41.55 49.95,41.95 50.4,42.4 51.4,42.4 51.6,42.6 51.6,43.6 51.68,43.68 R3.2 51.85,43.45
VCC  (via drill 0.6)  (14 unrouted)
  Top 0.305: C40.2 28.19,48.36 28.65,47.9 28.65,47.35 R30.1 29.25,46.75 29.25,44.05 R17.1 | R8.1 32.09,25 JP1.4 | R1.2 34.69,12.7 U$6.P$1 | R24.2 54,9.4 v53.4,10
  Top 0.406: U$3.P10 24.98,45.7 26.05,45.7 26.35,46 26.35,47.7 25.86,48.19 C40.2 25.2,49.02 25.2,50.2 24.4,51 19,51 16.6,53.4 v5.2,53.4 | U1.24 44.36,28.36 C2.1 | U1.34 53.48,31.37 C1.1 | U1.7 46.8,41 46.8,43.2 47.1,43.5 C51.1 | U1.14 42,37.8 v43.8,37.8 | U1.2 50.76,39.36 | 50.76,39.36 50.6,39.2 v49.8,39.2 | 50.76,39.36 50.77,39.35 U1.44 53.17,40.42 C4.1 | R7.2 R6.2 | R24.2 56.7,9.38 R12.2 | U$2.P10 26.45,26.65 26.8,27 26.8,28.57 C31.2 29.24,29.16 29.8,28.6 29.8,27.85 R31.1 30.15,27.5 30.15,25.65 30.14,25.64 R8.1 | 25.29,5.26 C50.2 24.75,4.75 U2.5 | U$6.P$1 34.26,10.52 30.51,10.52 | 23.37,2.99 R2.1 | U$1.P10 26.35,66.25 27.6,67.5 27.6,69 | R25.2 R26.2 | C52.2 28.05,57.6 | 28.05,57.6 28.05,57.55 | 28.05,57.6 28.25,57.4 32.4,57.4 32.8,57.8 32.8,64 32.2,64.6 30.76,64.6 R13.1 30.56,64.86 30.85,65.15 30.85,67.2 R32.1 30.45,67.95 29.6,68.8 27.8,68.8 27.6,69 | 27.6,69 27.6,69.42 26.73,70.28 C13.2 25.41,72.8 25.2,72.8
  Top 0.61: 23.37,2.99 25.25,2.99 C49.2 | v3.8,73.4 4.6,74.2 8.6,74.2 10,72.8 25.2,72.8
  Top 1.016: C49.2 25.29,5.26 | 30.51,10.52 C50.2 | v2.8,3.8 v3.8,2.8 v4.8,1.8 5.2,1.4 25,1.4 25.2,1.6 25.2,3
  Bottom 0.406: v43.8,37.8 43.84,37.77 C3.1 | v49.8,39.2 49.8,37.74 C5.1
  Bottom 0.61: 2.8,67.8 2.8,72.4 v3.8,73.4 | 2.8,51 v5.2,53.4
  Bottom 1.016: 5.2,1.4 v4.8,1.8 v3.8,2.8 v2.8,3.8 2.8,51 2.8,67.8
XTAL1
  Top 0.406: C8.1 27.61,32.41 Q2.1 33.06,34.86 33.6,35.4 41.91,35.4 U1.17
XTAL2
  Top 0.406: Q2.2 20.41,31.93 C9.1 20.7,34.7 20.8,34.8 25.6,34.8 27.4,36.6 33.4,36.6 33.8,36.2 41.89,36.2 U1.16
~RESET  (1 unrouted)
  Top 0.406: C30.1 46.78,12.71 R1.1 45.47,11.4 45.2,11.4 45.16,11.36 SW8.B